# Altium PCB Soldeerstation_PCB.PcbDoc (part 1 of 2)
Units mil, origin at the board's own origin, x right, y up, seen from the top; angles counter-clockwise.
Board outline 2015.02 x 3477.09 mil, 2 copper layers (Top Layer, Bottom Layer); 67 components, 39 nets, 214 pads, 115 vias.
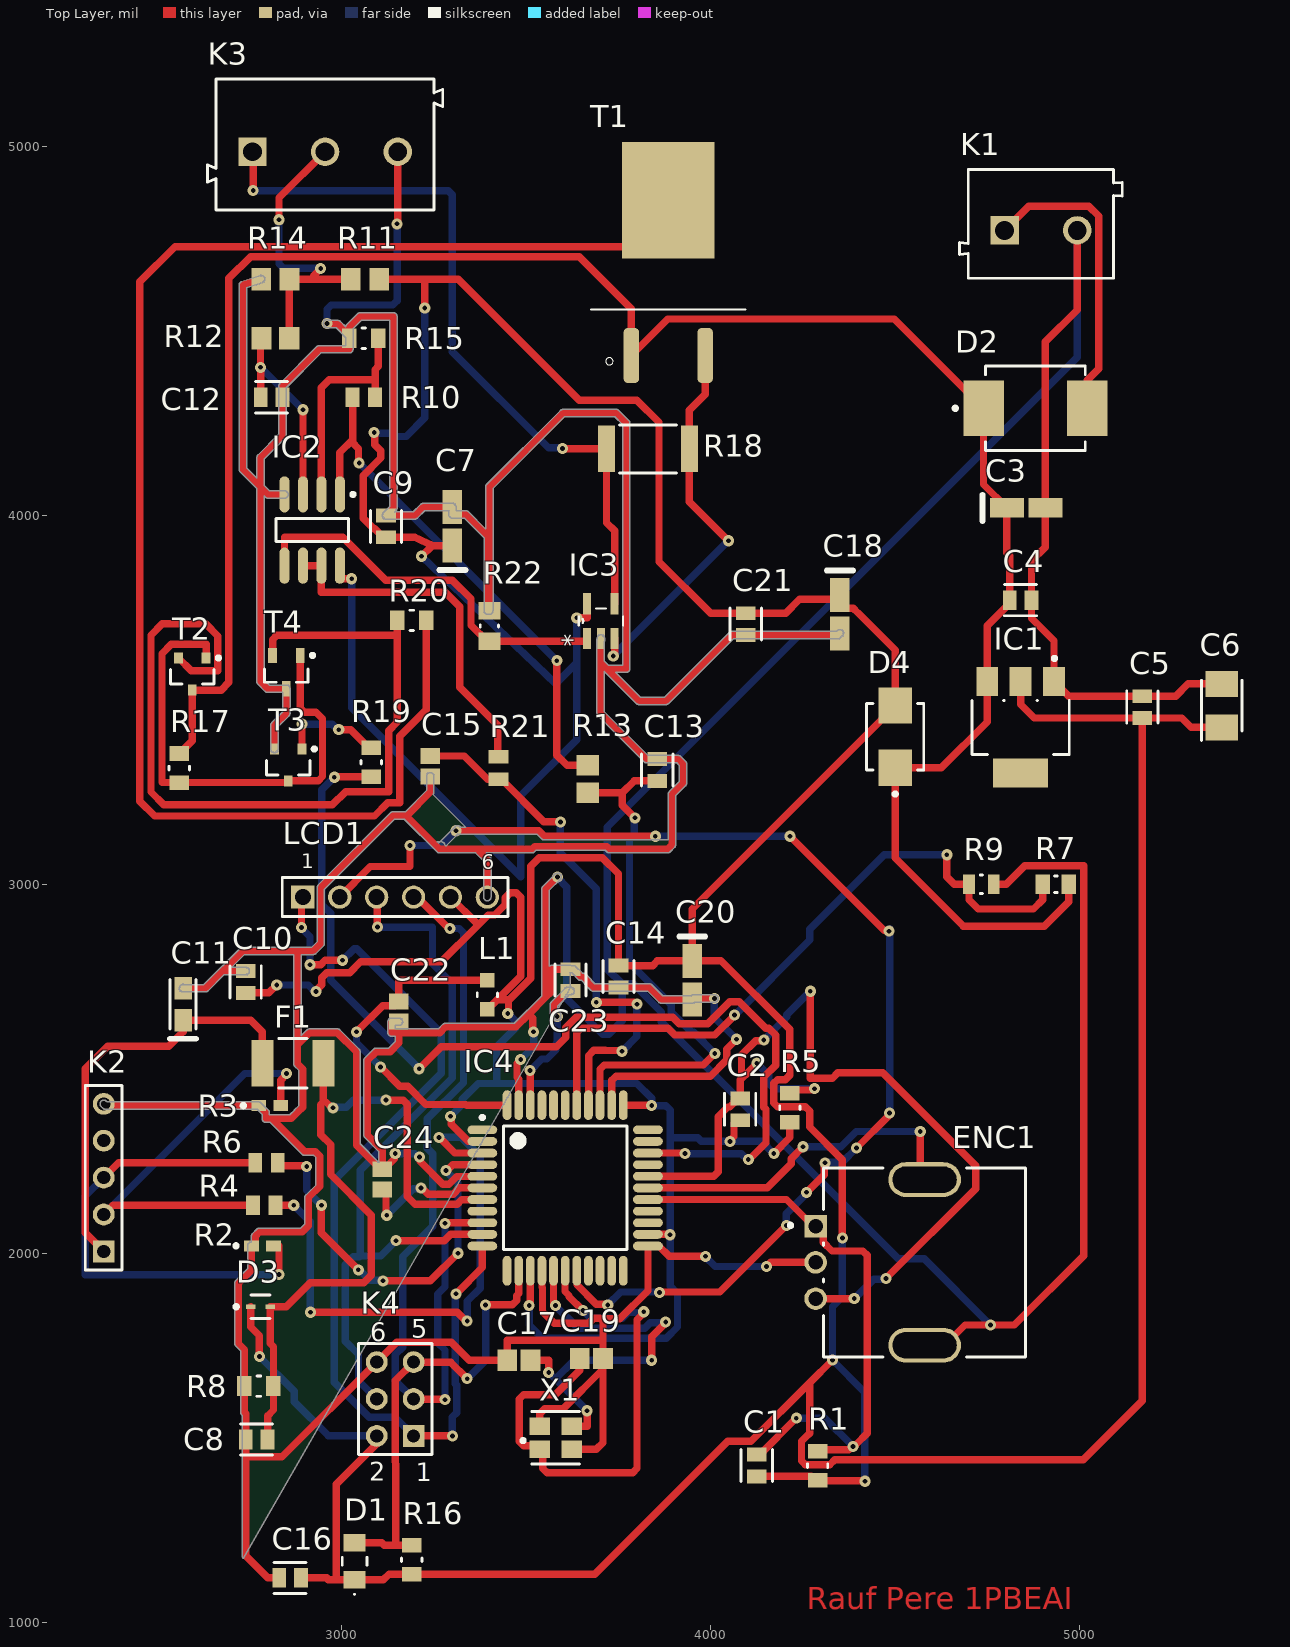
[diagram p0: Top Layer view]
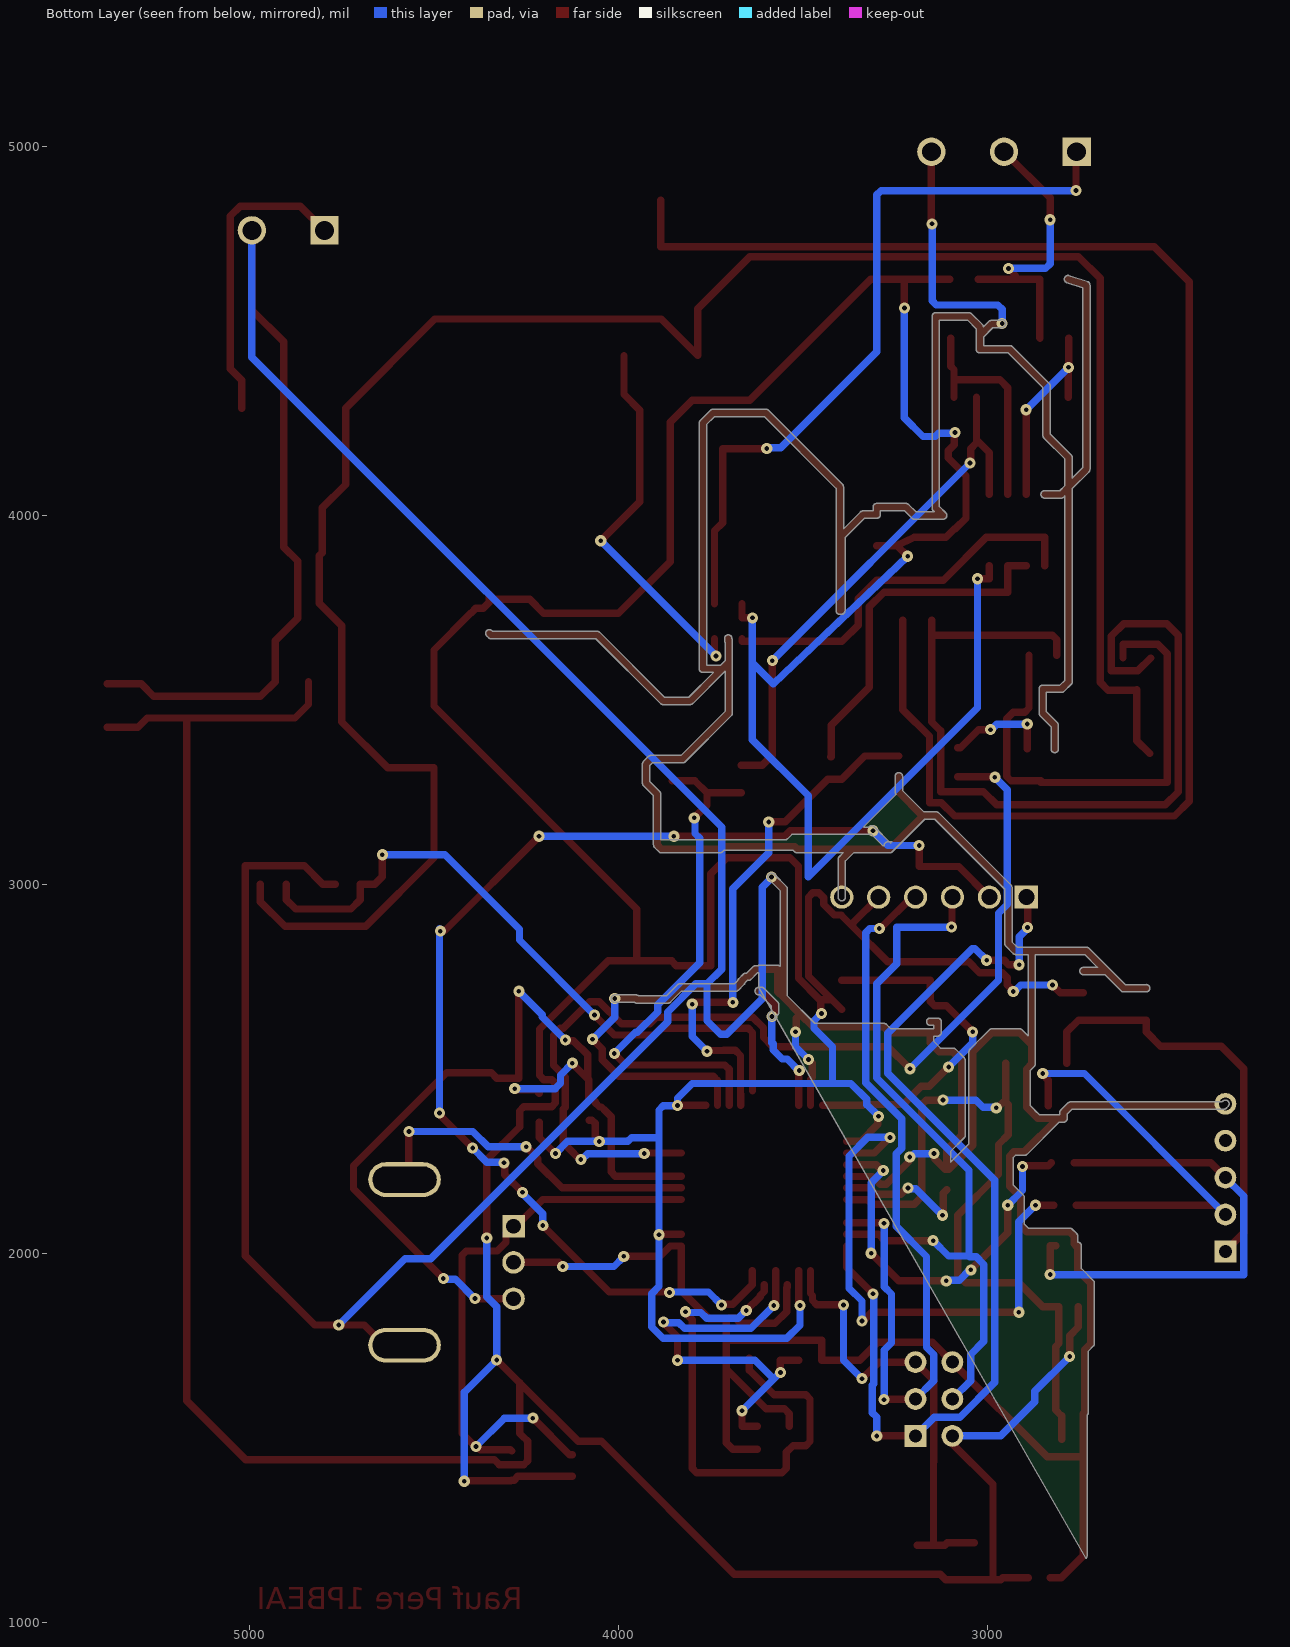
[diagram p1: Bottom Layer view, seen from below]

## Layer stack, top to bottom
Top Solder: solder mask 0.4, Solder Resist, Dk 3.5
Top Layer: signal copper 1.4
Dielectric 1: dielectric 12.6, FR-4, Dk 4.8
Bottom Layer: signal copper 1.4
Bottom Solder: solder mask 0.4, Solder Resist, Dk 3.5

## Board outline
372 vertices, not listed, extent 2344.99,1172.92 4360.02,4650.01

## Design rules (kind name [scope] priority, off if disabled: settings)
Clearance [All] p1: gap=7 ignorepadtopadclearanceinfootprint=FALSE
HoleSize [IsVia] p1: absolutevalues=TRUE maxlimit=13 minlimit=13 maxpercent=80.000 minpercent=20.000
HoleToHoleClearance HoleToHoleClearance_1 [All] p1: gap=19.68 allowstackedmicrovias=TRUE
PasteMaskExpansion [All] p1: expansion=10
PolygonConnect [All] p1: connectstyle=Relief reliefconductorwidth=10 reliefentries=4 polygonreliefangle="90 Angle" airgapwidth=10
RoutingVias [All] p1: holewidth=13 width=30 viastyle="Through Hole" minholewidth=13 minwidth=30 maxholewidth=13 maxwidth=30
SolderMaskExpansion [All] p1: expansion=10 istentingtop=FALSE
Width [All] p1: maxlimit=20 minlimit=20 preferedwidth=20 minimp=50.000000 maximp=50.000000 favimp=50.000000
27 further rules are at their usual default settings.

## Classes and differential pairs
component class Schema_Soldeerbout5: C1 C2 C10 ENC1 LCD1 R1 R5
component class Schema_Soldeerbout4: C12 C13 C15 C18 C21 IC3 K3 R7 R9 R10 R11 R12 R13 R14 R15 R17 R18 R19 R20 R21 R22 T1 T2 T3 T4
component class Schema_Soldeerbout3: K4
component class Schema_Soldeerbout2: C8 C11 D3 F1 K2 R2 R3 R4 R6 R8
component class Schema_Soldeerbout1: C3 C4 C5 C6 C7 C9 D2 D4 IC1 K1
component class ATMEGA: C14 C16 C17 C19 C20 C22 C23 C24 D1 IC4 L1 R16 X1

## Components (designator, comment, footprint, x,y, rotation, side; value= is the part's Value field where it differs from the comment)
C1 "C0805C103K2RACTU" FP-C0805C-DN-MFG 4124.68,1424.69 r90 top value="10,000 pF"
C2 "C0805C103K2RACTU" FP-C0805C-DN-MFG 4079.68,2390.16 r90 top value="10,000 pF"
C3 "T491A106K010AT" KEMT-A-3216-18-2_M 4855,4020 r0 top
C4 "C0805C104K5RACTU" FP-C0805C-DN-MFG 4840,3770 r0 top value="0.10 μF"
C5 "C0805C104K5RACTU" FP-C0805C-DN-MFG 5170,3480 r90 top value="0.10 μF"
C6 "10TPB47M" CAPPM3528X210N 5385,3484.06 r90 top
C7 "T491A106K010AT" KEMT-A-3216-18-2_M 3300,3970 r90 top
C8 "C0805C104K5RACTU" FP-C0805C-DN-MFG 2769.53,1495 r180 top value="0.10 μF"
C9 "C0805C104K5RACTU" FP-C0805C-DN-MFG 3120,3970 r90 top value="0.10 μF"
C10 "C0805C104K5RACTU" FP-C0805C-DN-MFG 2739.68,2735.16 r90 top value="0.10 μF"
C11 "TAJA226K010RNJ" AVX-TAJ-A-2_L 2570,2675 r90 top
C12 "C0805C103K2RACTU" FP-C0805C-DN-MFG 2810,4320 r0 top value="10,000 pF"
C13 "C0805C103K2RACTU" FP-C0805C-DN-MFG 3855,3309.53 r90 top value="10,000 pF"
C14 "C0805C104K5RACTU" FP-C0805C-DN-MFG 3750,2750 r270 top value="0.10 μF"
C15 "C0805C105K4PACTU" CAPC2013X145X50LL20T25 3240,3320 r90 top
C16 "C0805C104K5RACTU" FP-C0805C-DN-MFG 2860,1120 r180 top value="0.10 μF"
C17 "08052U220GAT2A" CAPC2013X115X51NL20T26 3480,1710 r0 top
C18 "T491A106K010AT" KEMT-A-3216-18-2_M 4350,3732.17 r270 top
C19 "08052U220GAT2A" CAPC2013X115X51NL20T26 3676.5,1715 r180 top
C20 "T491A106K010AT" KEMT-A-3216-18-2_M 3950,2740 r270 top
C21 "C0805C104K5RACTU" FP-C0805C-DN-MFG 4095,3705 r270 top value="0.10 μF"
C22 "C0805C105K4PACTU" CAPC2013X145X50LL20T25 3155,2655 r90 top
C23 "C0805C104K5RACTU" FP-C0805C-DN-MFG 3620,2740 r90 top value="0.10 μF"
C24 "C0805C105K4PACTU" CAPC2013X145X50LL20T25 3110,2200 r270 top
D1 "CD1206-S01575" BOUR-CD1206-S01575-2_L 3035,1165.2 r270 top
D2 "MBRS540T3G" ONSC-SMC-2-403-03_V 4880,4290 r0 top
D3 "BAT54KFILM" FP-SOD-523-MFG 2780,1855 r0 top value=7pF
D4 "S1AB-13-F" FP-SMB-MFG 4500,3400 r90 top
ENC1 "PEC11R-4015F-N0024" FP-PEC11R-4015F-N0024-MFG 4579.68,1975.16 r270 top
F1 "MF-MSMF050-2" FP-MF-MSMF050-2-MFG 2867.68,2515 r0 top value=0.15-1Ω
IC1 "NCP1117ST50T3G" FP-318H-MFG 4840,3425 r270 top
IC2 "MCP6002-E/SN" SOIC-SN8_M 2920,3960 r270 top
IC3 "INA138NA/250" DBV5 3702.4,3713 r90 top
IC4 "ATmega32U4-AU" 44ML_M 3605.59,2177.01 r0 top
K1 "691102710002" 691102710002 4895,4790 r0 top
K2 "Header 5" HDR1X5 2355,2005 r90 top
K3 "691101710003" 691101710003 2955,5005 r0 top
K4 "Header 3X2" HDR2X3 3195,1505 r90 top
L1 "MH2029-300Y" FP-MH2029-MFG 3395,2700 r90 top value=30Ω
LCD1 "61300611121" 61300611121 3144.68,2965.16 r0 top
R1 "RN73C2A10KBTDF" FP-RN732A-MFG 4289.68,1424.53 r270 top value=10KΩ
R2 "CG0603MLC-05E" BOUR-CG0603-2_V 2785.08,2020 r0 top
R3 "CG0603MLC-05E" BOUR-CG0603-2_V 2804.92,2400 r0 top
R4 "ERJ6ENF22R0V" RESC2013X70X40LL20T20 2790,2130 r0 top
R5 "RN73C2A10KBTDF" FP-RN732A-MFG 4214.68,2394.53 r270 top value=10KΩ
R6 "ERJ6ENF22R0V" RESC2013X70X40LL20T20 2796.02,2245 r0 top
R7 "RC0805FR-0710KL" RESC2013X60X35NL10T20 4935.43,3000 r0 top
R8 "RN73C2A10KBTDF" FP-RN732A-MFG 2775.63,1640 r0 top value=10KΩ
R9 "CRCW08052K70FKEA" FP-CRCW0805-e3-IPC_C 4733.5,3000 r0 top
R10 "RG2012P-183-D-T5" RESC2013X50X40LL20T20 3060,4320 r0 top
R11 "RR1220P-105-D" RESC2013X50X40ML20T20 3063.39,4640 r0 top
R12 "ERA6AEB562V" RESC2013X60X40ML20T25 2820,4480 r0 top
R13 "ERA6AEB562V" RESC2013X60X40ML20T25 3667.4,3285 r90 top
R14 "RR1220P-105-D" RESC2013X50X40ML20T20 2820,4640 r0 top
R15 "RN73C2A100RBTDF" FP-RN732A-MFG 3060,4480 r0 top value=100Ω
R16 "RN73C2A10KBTDF" FP-RN732A-MFG 3190,1169.37 r270 top value=10KΩ
R17 "RN73C2A4K75BTDF" FP-RN732A-MFG 2560,3315 r90 top value=4.75KΩ
R18 "CSRN2512FK20L0" FP-CSRN2512-IPC_C 3830,4180 r180 top
R19 "RN73C2A10KBTDF" FP-RN732A-MFG 3080,3330.63 r90 top value=10KΩ
R20 "RN73C2A100RBTDF" FP-RN732A-MFG 3190,3715 r0 top value=100Ω
R21 "RR1220P-104-D" RESC2013X50X40LL20T20 3425,3315 r90 top
R22 "CRCW0805560KFKEA" FP-CRCW0805-e3-IPC_A 3400,3700 r90 top
T1 "IRF9540NSPBF" DPAK508P1524X483-3N 3885,4685 r0 top
T2 "BC847C" INF-SOT23_L 2595,3570 r270 top
T3 "BC847C" INF-SOT23_L 2855,3323.31 r270 top
T4 "BC857C" INF-SOT23_N 2850,3575 r270 top
X1 "ABM8AIG-16.000MHZ-12-2Z-T3" FP-ABM8AIG-MFG 3580,1500 r0 top

## Footprints (in the part's own frame and the unit in brackets; to place one, negate y for a bottom-side part, rotate by r counter-clockwise, add the part's x,y. Pads: shape width x height; smd on the part's side, far side on the other; paste and mask are expansions set on the pad)
44ML_M [mm] "Thin QFP, 44-Leads, Body 10x10mm, Pitch 0.8mm, IPC Low Density"
  oval 2.05x0.6 smd: 1(-5.7,4) 2(-5.7,3.2) 3(-5.7,2.4) 4(-5.7,1.6) 5(-5.7,0.8) 6(-5.7,0) 7(-5.7,-0.8) 8(-5.7,-1.6) 9(-5.7,-2.4) 10(-5.7,-3.2) 11(-5.7,-4) 23(5.7,-4) 24(5.7,-3.2) 25(5.7,-2.4) 26(5.7,-1.6) 27(5.7,-0.8) 28(5.7,0) 29(5.7,0.8) 30(5.7,1.6) 31(5.7,2.4) 32(5.7,3.2) 33(5.7,4)
  oval 0.6x2.05 smd: 12(-4,-5.7) 13(-3.2,-5.7) 14(-2.4,-5.7) 15(-1.6,-5.7) 16(-0.8,-5.7) 17(0,-5.7) 18(0.8,-5.7) 19(1.6,-5.7) 20(2.4,-5.7) 21(3.2,-5.7) 22(4,-5.7) 34(4,5.7) 35(3.2,5.7) 36(2.4,5.7) 37(1.6,5.7) 38(0.8,5.7) 39(0,5.7) 40(-0.8,5.7) 41(-1.6,5.7) 42(-2.4,5.7) 43(-3.2,5.7) 44(-4,5.7)
  silkscreen extent -5.82,-4.25 4.25,4.97, body extent -5,-5 5,5, height 1.2
61300611121 [mm] "Pin Header, pitch 2.54 mm, THT, Vertical, single row, 6p"
  rect 1.6x1.6 hole 1.1: 1(-6.35,0)
  round 1.6 hole 1.1: 2(-3.81,0) 3(-1.27,0) 4(1.27,0) 5(3.81,0) 6(6.35,0)
  silkscreen extent -7.77,-1.34 7.77,1.34, body extent -7.62,-1.27 7.62,1.27, height 8.57
691101710003 [mm] "5,00mm - modular - blue - Horizontal entry with pressure clamp - 12,6mm height - 03p"
  rect 1.95x1.95 hole 1.3: 1(-5,-0.5)
  round 1.95 hole 1.3: 2(0,-0.5) 3(5,-0.5)
  silkscreen extent -8.1,-4.5 8.1,4.5, body extent -8.1,-4.5 8.1,4.5, height 12.65
691102710002 [mm] "5,00mm - modular - blue - Horizontal entry with pressure clamp - 9,9 mm height - 02p"
  rect 1.95x1.95 hole 1.3: 1(-2.5,-0.45)
  round 1.95 hole 1.3: 2(2.5,-0.45)
  silkscreen extent -5.6,-3.75 5.6,3.75, body extent -5.6,-3.75 5.6,3.75, height 9.96
AVX-TAJ-A-2_L [mm] "Molded Capacitor, 2-Leads, Body 3.4x1.8mm, IPC High Density"
  rect 1.55x1.2 smd: 1(-1.1,0) 2(1.1,0)
  silkscreen extent -2.38,-0.9 1.7,0.9, body extent -1.92,-0.9 1.92,0.9, height 1.8
BOUR-CD1206-S01575-2_L [mm] "Molded Diode, 2-Leads, Body 3.4x1.7mm, IPC High Density"
  rect 1.2x1.5 smd: 1(-1.275,0) 2(1.275,0)
  silkscreen extent -0.27,-0.85 2.32,0.85, body extent -1.7,-0.85 1.7,0.85, height 0.95
BOUR-CG0603-2_V [mm] "SMD, 2-Leads, Body 1.6x0.8mm, Pitch 1.52mm"
  rect 1.02x0.76 smd: 1(-0.76,0) 2(0.76,0)
  silkscreen extent -1.94,-0.12 -1.69,0.12, body extent -0.8,-0.4 0.8,0.4, height 0.55
CAPC2013X115X51NL20T26 [mm] "Chip Capacitor, 2-Leads, Body 2.01x1.25mm, IPC Medium Density"
  rect 1.35x1.45 smd: 1(-0.8,0) 2(0.8,0)
  body extent -1.11,-0.72 1.1,0.72, height 1.15
CAPC2013X145X50LL20T25 [mm] "Chip Capacitor, 2-Leads, Body 2.00x1.25mm, IPC High Density"
  rect 1.1x1.35 smd: 1(-0.7,0) 2(0.7,0)
  body extent -1.1,-0.72 1.1,0.72, height 1.45
CAPPM3528X210N [mm]
  rect 1.8x2.25 smd: 1(-1.5,0) 2(1.5,0)
  silkscreen extent -2.4,-1.4 1.75,1.4, body extent 0,0 0,0
DBV5 [mil]
  rect 58x22 smd: 1(-47,37.4) 2(-47,0) 3(-47,-37.4) 4(47,-37.4) 5(47,37.4)
  silkscreen extent -12,-60 34,60, body extent 0,-42 355,72, height 47
DPAK508P1524X483-3N [mm]
  rrect53% 1.06x3.78 smd: 1(-2.54,-6.4) 3(2.54,-6.4)
  rect 6.39x8 smd paste-5 mask+0: 2(0,4.29)
  silkscreen extent -5.34,-7.05 5.32,-3.24, body extent -5.08,-7.62 5.08,7.62, height 4.83
FP-318H-MFG [mm]
  rect 2x1.5 smd paste+0 mask+0: 1(-3.15,2.3) 2(-3.15,0) 3(-3.15,-2.3)
  rect 2x3.8 smd paste+0 mask+0: 4(3.15,0)
  silkscreen extent -4.87,-3.35 1.85,3.35, body extent -4.25,-3.68 4.25,3.68, height 0.25
FP-ABM8AIG-MFG [mm]
  rect 1.4x1.2 smd paste+0 mask+0: 1(-1.1,-0.8) 2(1.1,-0.8) 3(1.1,0.8) 4(-1.1,0.8)
  silkscreen extent -2.37,-1.8 1.65,1.8, body extent -1.9,-1.5 1.9,1.5, height 0.25
FP-C0805C-DN-MFG [mm]
  rect 0.95x1.35 smd paste+0 mask+0: 1(-0.75,0) 2(0.75,0)
  silkscreen extent -1.1,-1.07 1.1,1.07, body extent -1.4,-0.85 1.4,0.85, height 0.25
FP-CRCW0805-e3-IPC_A [mil]
  rect 47.5x59.38 smd paste+0 mask+0: 1(-41.37,0) 2(41.37,0)
  silkscreen extent -3,-25 3,25, body extent -85,-49 85,49, height 10
FP-CRCW0805-e3-IPC_C [mil]
  rect 31.75x51.5 smd paste+0 mask+0: 1(-33.5,0) 2(33.5,0)
  silkscreen extent -3,-25 3,25, body extent -53,-31 53,31, height 10
FP-CSRN2512-IPC_C [mil]
  rect 45.46x126.31 smd paste+0 mask+0: 1(-112.24,0) 2(112.24,0)
  silkscreen extent -78,-65 78,65, body extent -139,-69 139,69, height 10
FP-MF-MSMF050-2-MFG [mm]
  rect 1.5x3.2 smd paste+0 mask+0: 1(-2.1,0) 2(2.1,0)
  silkscreen extent -0.98,-1.71 0.98,1.71, body extent -2.95,-1.81 2.95,1.81, height 0.25
FP-MH2029-MFG [mm]
  rect 1x1 smd paste+0 mask+0: 1(-1,0) 2(1,0)
  silkscreen extent -0.13,-0.7 0.13,0.7, body extent -1.6,-0.8 1.6,0.8, height 0.25
FP-PEC11R-4015F-N0024-MFG [mm]
  rrect100% 2.4x5 hole 4.4 slot 1.8 at 0 deg paste-1000 mask+0: 1(-5.7,0) 2(5.7,0)
  rect 1.55x1.55 hole 1 paste-1000 mask+0: A(-2.5,-7.5)
  round 1.55 hole 1 paste-1000 mask+0: B(2.5,-7.5) C(0,-7.5)
  silkscreen extent -6.5,-9.35 6.5,6.95, body extent -7,-8.37 7,7.05, height 0.25
FP-RN732A-MFG [mm]
  rect 1x1.35 smd paste+0 mask+0: 1(-1,0) 2(1,0)
  silkscreen extent -0.13,-0.7 0.13,0.7, body extent -1.6,-0.8 1.6,0.8, height 0.25
FP-SMB-MFG [mm]
  rect 2.5x2.3 smd paste+0 mask+0: 1(-2.15,0) 2(2.15,0)
  silkscreen extent -4.07,-1.97 2.28,1.97, body extent -3.5,-2.07 3.5,2.07, height 0.25
FP-SOD-523-MFG [mm]
  rect 0.65x0.3 smd paste+0 mask+0: 1(-0.675,0) 2(0.675,0)
  silkscreen extent -1.8,-0.8 0.65,0.8, body extent -1.1,-0.55 1.1,0.55, height 0.25
HDR1X5 [mm] "Connector; Header; 5 Position"
  rect 1.5x1.5 hole 0.9: 1(0,0)
  round 1.5 hole 0.9: 2(2.54,0) 3(5.08,0) 4(7.62,0) 5(10.16,0)
  silkscreen extent -1.27,-1.27 11.43,1.27
HDR2X3 [mm] "Connector; Header; 3x2 Position"
  rect 1.5x1.5 hole 0.9: 1(0,0)
  round 1.5 hole 0.9: 2(0,2.54) 3(2.54,0) 4(2.54,2.54) 5(5.08,0) 6(5.08,2.54)
  silkscreen extent -1.27,-1.27 6.35,3.81
INF-SOT23_L [mm] "SOT23, 3-Leads, Body 2.9x1.3 mm, Pitch 0.95 mm, IPC High Density"
  rect 0.75x0.6 smd: 1(-1.1,0.95) 2(-1.1,-0.95) 3(1.1,0)
  silkscreen extent -1.22,-1.5 0.7,1.93, body extent -0.7,-1.5 0.7,1.5, height 1.1
INF-SOT23_N [mm] "SOT23, 3-Leads, Body 2.9x1.3 mm, Pitch 0.95 mm, IPC Medium Density"
  rect 1.05x0.6 smd: 1(-1.15,0.95) 2(-1.15,-0.95) 3(1.15,0)
  silkscreen extent -1.27,-1.5 0.7,1.93, body extent -0.7,-1.5 0.7,1.5, height 1.1
KEMT-A-3216-18-2_M [mm] "Molded TAN Capacitor, 2-Leads, Body 3.4x1.8mm, IPC Low Density"
  rect 2.35x1.35 smd: 1(-1.325,0) 2(1.325,0)
  silkscreen extent -3,-0.9 -3,0.9, body extent -1.7,-0.9 1.7,0.9, height 1.8
ONSC-SMC-2-403-03_V [mil] "Molded, 2-Leads, Body 6.86x5.84mm"
  rect 110x150 smd: 1(-140.49,0) 2(140.49,0)
  silkscreen extent -222,-115 135,115, body extent -135,-115 135,115, height 99
RESC2013X50X40LL20T20 [mm] "Chip Resistor, 2-Leads, Body 2.00x1.25mm, IPC High Density"
  rect 0.95x1.35 smd: 1(-0.775,0) 2(0.775,0)
  body extent -1.1,-0.72 1.1,0.72, height 0.5
RESC2013X50X40ML20T20 [mm] "Chip Resistor, 2-Leads, Body 2.00x1.25mm, IPC Low Density"
  rect 1.35x1.55 smd: 1(-0.975,0) 2(0.975,0)
  body extent -1.1,-0.72 1.1,0.72, height 0.5
RESC2013X60X35NL10T20 [mm] "Chip Resistor, 2-Leads, Body 2.1x1.35mm, IPC Medium Density"
  rect 1x1.35 smd: 1(-0.9,0) 2(0.9,0)
  silkscreen extent -0.1,-0.58 0.1,0.58, body extent -1.05,-0.68 1.05,0.67, height 0.6
RESC2013X60X40ML20T25 [mm] "Chip Resistor, 2-Leads, Body 2.00x1.25mm, IPC Low Density"
  rect 1.4x1.55 smd: 1(-0.95,0) 2(0.95,0)
  body extent -1.1,-0.72 1.1,0.72, height 0.6
RESC2013X70X40LL20T20 [mm] "Chip Resistor, 2-Leads, Body 2.00x1.25mm, IPC High Density"
  rect 0.95x1.35 smd: 1(-0.775,0) 2(0.775,0)
  body extent -1.1,-0.72 1.1,0.72, height 0.7
SOIC-SN8_M [mm] "SOIC, 8-Leads, Body 4.9x3.9mm, Pitch 1.27mm, IPC Low Density"
  oval 2.5x0.7 smd: 1(-2.45,1.905) 2(-2.45,0.635) 3(-2.45,-0.635) 4(-2.45,-1.905) 5(2.45,-1.905) 6(2.45,-0.635) 7(2.45,0.635) 8(2.45,1.905)
  silkscreen extent -2.57,-2.5 0.8,2.93, body extent -2,-2.5 2,2.5, height 1.75

## Part data
C1 C2 C12 C13: library part CMP-2007-00259-2, "CAP CER 10000PF 200V X7R 0805", Capacitance="10,000 pF", Manufacturer=KEMET, Package=C0805C-DN, Temperature="-55°C to +125°C", Temperature Characteristic=X7R, Temperature Coefficient=30ppm/°C, Temperature Range High=+125°C, Temperature Range Low=-55°C, Tolerance=0.1, Voltage Rating="200 V", Automotive=No, Category=Cap, ComponentLink2Description=Datasheet, ComponentLink2URL=https://content.kemet.com/datasheets/KEM_C1003_C0G_SMD.pdf, Device Class L1="Passive Components", Device Class L2=Capacitors, Device Class L3="Ceramic Capacitors", Digikey Description="CAP CER 10000PF 200V X7R 0805", Height=0.88mm, Ipc Land Pattern Name=CAPC200125X78, Lead Free=Yes, Manufacturer Part Number=C0805C103K2RACTU, Material=Ceramic, Mouser Description="KEMET - C0805C103K2RACTU - CAP, MLCC, X7R, 10NF, 200V, 0805", Octopart=https://octopart.com/c0805c103k2ractu-kemet-9138347, RoHS=TRUE
C3 C7 C18 C20: library part CMP-2000-05172-1, "Capacitor, Tantalum, 10 uF, +/- 10%, 10 V, -55 to 125 degC, 2-Pin SMD (1206), RoHS, Tape and Reel", Capacitance=10µF, ESR (Equivalent Series Resistance)=3.8Ohm, Lifetime @ Temp.=2000Hrs@85degC, Manufacturer=Kemet, Manufacturer Size Code=A, Operating Temperature=-55degC~125degC, Package / Case=1206(3216Metric), Package Description="2-Pin Surface Mount Device, Body 3.2 x 1.6 mm", Package Reference=1206, Standard Package=2,000, Tolerance=±10%, Voltage - Rated=10V, Catalog Drawings=T49x,T5xxSeries_A-side1T49x,T5xxSeries_A,B-side2T49x,T5xxSeries_A,SBottom, Category=Capacitors, Datasheet URL=http://www.farnell.com/datasheets/1824869.pdf, Datasheet Version=Apr-14, Family=TantalumCapacitors, Features=GeneralPurpose, Height - Seated (Max)="0.071\"(1.80mm)", Lead Spacing=-, Manufacturer URL=http://www.kemet.com/, Mounting Type=SurfaceMount, Online Catalog=T491Series, Other Names=399-3684-2, Packaging=Tape&Reel(TR), Product Training Modules=CapacitorBasics-TypicalUsesforCapacitorsDeratingGuidelinesforSurfaceMountTantalumCapacitors, Series=T491, Size / Dimension="0.126\"Lx0.063\"W(3.20mmx1.60mm)", Type=Molded
C4 C5 C8 C9 C10 C14 C16 C21 C23: library part CMP-2007-00279-2, "CAP CER 0.1UF 50V X7R 0805", Capacitance="0.10 μF", Manufacturer=KEMET, Package=C0805C-DN, Temperature="-55°C to +125°C", Temperature Characteristic=X7R, Temperature Coefficient=30ppm/°C, Temperature Range High=+125°C, Temperature Range Low=-55°C, Tolerance=0.1, Voltage Rating="50 V", Automotive=No, Category=Cap, ComponentLink2Description=Datasheet, ComponentLink2URL=https://content.kemet.com/datasheets/KEM_C1003_C0G_SMD.pdf, Device Class L1="Passive Components", Device Class L2=Capacitors, Device Class L3="Ceramic Capacitors", Digikey Description="CAP CER 0.1UF 50V X7R 0805", Height=0.88mm, Ipc Land Pattern Name=CAPC200125X78, Lead Free=Yes, Manufacturer Part Number=C0805C104K5RACTU, Material=Ceramic, Mouser Description="Cap Ceramic 0.1uF 50V X7R 10% SMD 2.0 x 1.2 mm 125 C Paper T/R", Octopart=https://octopart.com/c0805c104k5ractu-kemet-143926, RoHS=TRUE
C6: "Capacitor Polarised", Manufacturer_Name=Panasonic, Mouser Part Number=667-10TPB47M, Arrow Part Number=10TPB47M, Arrow Price/Stock=https://www.arrow.com/en/products/10tpb47m/panasonic, Datasheet Link=https://www.mouser.com/datasheet/2/315/AAA8000C65-1150039.pdf, Height=2.1mm, Manufacturer_Part_Number=10TPB47M, Mouser Price/Stock=https://www.mouser.co.uk/ProductDetail/Panasonic/10TPB47M/?qs=OE1iw1LrrPF6e38T0%252BNoyw%3D%3D
C11: library part CMP-2000-07524-1, "Chip Capacitor, 22 uF, +/- 10%, 10 V, -55 to 125 degC, 1206 (3216 Metric), RoHS, Tape and Reel", Capacitance=22uF, Case Code (Imperial)=1206, Case Code (Metric)=3216, Dielectric Material=Tantalum, ESR (Equivalent Series Resistance)=3Ohm, Leakage Current=2.2uA, Manufacturer=AVX, Max Operating Temperature=125degC, Min Operating Temperature=-55degC, Package Description="2-Pin Surface Mount Device, Body 3.2 x 1.65 mm", Package Quantity=1, Package Reference=TAJ-A-2, Tolerance=10%, Voltage=10V, Case/Package=1206, Datasheet URL=http://datasheets.avx.com/TAJ.pdf, Datasheet Version=09/2017, Depth=1.6mm, Dissipation Factor=8%, Height=1.6mm, Height - Seated (Max)=0.071inch, Lead Free=LeadFree, Lead Pitch=1.1mm, Length=3.2mm, Manufacturer URL=http://www.avx.com/, Mount=PCB, Mounting Technology=SurfaceMount, Number of Pins=2, Packaging=TapeandReel, Polarity=Polar, Radiation Hardening=No, REACH SVHC=NoSVHC, RoHSCompliant=True, Termination=SMD/SMT, Voltage Rating=10V, Voltage Rating (DC)=10V, Width=1.6mm
C15 C22 C24: library part CMP-1036-04746-2, Manufacturer=Kemet, Part Number=C0805C105K4PACTU
C17 C19: library part CMP-2007-04866-1, Manufacturer="AVX Interconnect / Elco", Part Number=08052U220GAT2A
D1: library part CMP-0583-00001-2, "75 V Small Signal Switching Diode, 150 mA, 2.5 uA, 1026 Molded Package, RoHS, Tape and Reel", Average Forward Current="150 mA", Capacitance Between Terminals (Max.)="3 pF", Forward Voltage (Max.)="1.00 V", Manufacturer=Bourns, Reverse Current (Max.)="2.5 uA", Reverse Voltage="75 V", ComponentLink1Description="Manufacturer URL", ComponentLink1URL=http://www.bourns.com/, ComponentLink2Description=Datasheet, ComponentLink2URL=http://www.bourns.com/data/global/pdfs/CD1206_S01575.pdf, ComponentLink3Description="Package Specification", ComponentLink3URL=http://www.bourns.com/data/global/pdfs/CD1206_S01575.pdf, DatasheetVersion="Rev. 06/11", Mounting Technology="Surface Mount", PackageDescription="2-Pin SMD, Body 3.2 x 1.5 mm", PackageReference=CD1206-S01575-2, Packing="Tape and Reel", PartNumber=CD1206-S01575, Reverse Recovery Time (Max.)="4 nS", RoHS=TRUE
D2: library part CMP-1055-00390-1, "Schottky Power Rectifier, 2-Pin SMC, Pb-Free, Tape and Reel", Manufacturer="On Semiconductor", ComponentLink1Description="Manufacturer URL", ComponentLink1URL=http://www.onsemi.com/, ComponentLink2Description=Datasheet, ComponentLink2URL=http://www.onsemi.cn/pub_link/Collateral/MBRS540T3-D.PDF, ComponentLink3Description="Package Specification", ComponentLink3URL=http://www.onsemi.com/pub_link/Collateral/403-03.PDF, Configuration=Single, DatasheetVersion="Rev. 8", IFSM Max (A)=190, Mounting Technology="Surface Mount", PackageDescription="2-Pin Small Molded Package, J-Bend Lead, Body 5.845 x 6.855 mm", PackageReference=SMC-2-403-03, PackageVersion="Rev. E, 08/2005", Packing="Tape and Reel", PartNumber=MBRS540T3G, RoHS=TRUE
D3: library part CMP-12187-000026-1, "DIODE SCHOTTKY 40V 300MA SOD523", Capacitance=7pF, Forward Current=300mA, Manufacturer=STMicroelectronics, Max Junction Temp=+150°C, Max Repetitive Reverse Voltage=40V, Max Surge Forward Current=1.25A, Package=SOD-523, Peak Reverse Current=1uA, Temperature="-40°C to +150°C", Temperature Range Low=-40°C, Automotive=No, Category=Diode, ComponentLink2Description=Datasheet, ComponentLink2URL=https://www.st.com/content/ccc/resource/technical/document/datasheet/07/50/54/f2/0d/ba/4a/79/CD00001322.pdf/files/CD00001322.pdf/jcr:content/translations/en.CD00001322.pdf, Device Class L1="Discrete Semiconductors", Device Class L2=Diodes, Device Class L3="Schottky Diodes", Digikey Description="DIODE SCHOTTKY 40V 300MA SOD523", Height=0.7mm, Lead Free=Yes, Manufacturer Part Number=BAT54KFILM, Mouser Description="Schottky Diodes & Rectifiers schottky diode", Octopart=https://octopart.com/bat54kfilm-stmicroelectronics-39618022, RoHS=TRUE, Temperature Range High=+150°C
D4: library part CMP-0586-00001-3, "DIODE GEN PURP 50V 1A SMB", Average Rectified Current=1A, Capacitance=10pF, Case/Package=SMB, Forward Voltage=1.1V, Max Operating Temperature=150°C, Max Repetitive Reverse Voltage (Vrrm)=50V, Max Surge Current=30A, Min Operating Temperature=-65°C, Package Quantity=3000, Peak Reverse Current=5uA, Current Rating=1A, Element Configuration=Single, Forward Current=1A, Height=2.42mm, Lead Free="Lead Free", Length=4.57mm, Max Reverse Voltage (DC)=50V, Number of Pins=2, Output Current=1A, Packaging="Tape and Reel", Peak Non-Repetitive Surge Current=30A, Polarity=Standard, Radiation Hardening=No, Recovery Time=1.8us, Reverse Recovery Time=1.8us, Reverse Voltage (DC)=50V, Termination=SMD/SMT, Voltage Rating (DC)=50V, Weight=0.00328oz, Width=3.94mm
ENC1: library part CMP-07421-000003-1, "ROTARY ENCODER MECHANICAL 24PPR", Current Rating=10mA, Manufacturer=Bourns, Package=0, Temperature="-30°C to +70°C", Temperature Range High=+70°C, Temperature Range Low=-30°C, Voltage Rating Dc=5V, Automotive=No, Category=Enc, ComponentLink2Description=Datasheet, ComponentLink2URL=https://www.bourns.com/docs/product-datasheets/pec11r.pdf?sfvrsn=bb617cbf_7, Conn Orientation=Vertical, Detent=No, Device Class L1=Electromechanical, Device Class L2=Switches, Device Class L3=Encoders, Digikey Description="ROTARY ENCODER MECHANICAL 24PPR", Encoder Type=Incremental, Height=22.3mm, Lead Free=Yes, Manufacturer Part Number=PEC11R-4015F-N0024, Mouser Description="Encoders 15mm SHAFT NO SWITCH", Number Of Circuits=1, Octopart=https://octopart.com/pec11r-4015f-n0024-bourns-26648251, Pulses Per Rev=24, RoHS=TRUE
F1: library part CMP-2100-03653-2, "PTC RESET FUSE 15V 500MA 1812", Ambient Temperature Range High=+85°C, Ambient Temperature Range Low=-40°C, Current Rating=100A, Hold Current=0.5A, Manufacturer=Bourns, Package=1812, Resistance=0.15-1Ω, Temperature="-40°C to +85°C", Trip Current=1A, Voltage Rating=15V, Automotive=Yes, Automotive Grade="Grade 3", Category=Fuse, ComponentLink2Description=Datasheet, ComponentLink2URL=http://www.bourns.com/docs/Product-Datasheets/mfmsmf.pdf, Device Class L1="Circuit Protection", Device Class L2="PTC Resettable Fuses", Device Class L3=unset, Digikey Description="PTC RESET FUSE 15V 500MA 1812", Height=0.85mm, Lead Free=Yes, Manufacturer Part Number=MF-MSMF050-2, Mouser Description="PTC Resettable Fuse 0.5A(hold) 1A(trip) 15V 100A 0.8W 0.15s 0.15Ohm SMD Solder Pad 1812 T/R", Octopart=https://octopart.com/mf-msmf050-2-bourns-28047, RoHS=TRUE, Temperature Range High=+85°C, Temperature Range Low=-40°C, Trip Time=0.15s
IC1: library part CMP-0592-00001-3, "IC REG LINEAR 5V 1A SOT223", Case/Package=SOT-223, Dropout Voltage=1.2V, Input Bias Current=6mA, Max Input Voltage=20V, Max Operating Temperature=125°C, Max Output Current=1A, Min Input Voltage=3.5V, Min Operating Temperature=0°C, Nominal Output Voltage=5V, Output Voltage Accuracy=1%, Package Quantity=1, Power Rating=781mW, Quiescent Current=10mA, Accuracy=1%, Contact Plating=Tin, Halogen Free="Halogen Free", Height=1.69mm, Lead Free="Lead Free", Length=6.7mm, Min Current Limit=1A, Number of Outputs=1, Number of Pins=4, Number of Regulators=1, Output Current=1A, Output Type=Fixed, Output Voltage=5V, Packaging="Tape and Reel", Polarity=Positive, Radiation Hardening=No, REACH SVHC="No SVHC", Tolerance=1%, Width=3.7mm
IC2: library part CMP-0187-00368-2, "1 MHz, Low-Power Operational Amplifier, 8-Pin SOIC, Extended Temperature", Code_IPC=SOIC127P600-8, Code_JEDEC=MS-012, ComponentLink1Description="Manufacturer URL", ComponentLink1URL=http://www.microchip.com/, ComponentLink2Description=Datasheet, ComponentLink2URL=http://ww1.microchip.com/downloads/en/DeviceDoc/21733j.pdf, ComponentLink3Description="Package Specification", ComponentLink3URL=http://www.microchip.com/stellent/groups/techpub_sg/documents/packagingspec/en012702.pdf, DatasheetVersion="revJ, Nov-2009", PackageDescription="8-Lead Plastic Small Outline (SN) - Narrow, 3.90mm Body [SOIC]", PackageReference=SOIC-SN8, PackageVersion="revBB, Aug-2009", RevisionNote="URLs added."
IC3: "High-Side Measurement Current Shunt Monitor, Current Output", Manufacturer="Texas Instruments", PACKAGE_DESIGNATOR=DBV, Copyright="Copyright (C) 2018 Accelerated Designs. All rights reserved", Datasheet_URL=http://www.ti.com/lit/gpn/INA138, FAMILY_NAME="CURRENT SHUNT MONITOR", GENERIC_PART_NUMBER=INA138, INDUSTRY_STD_PKG_TYPE=SOT-23, Manufacturer_Part_Number=INA138NA/250, PIN_COUNT=5, RefDes=RefDes, Type=DEV, Vendor="Texas Instruments"
IC4: library part CMP-0095-00285-2, "8-bit AVR Microcontroller, 2.7-5.5V, 16MHz, 32KB Flash, 1KB EEPROM, 2.5KB SRAM, USB Controller, 44-pin TQFP, Industrial Grade (-40°C to 85°C), Ext Osc", ComponentLink1Description="Manufacturer URL", ComponentLink1URL=http://www.atmel.com/, ComponentLink2Description="ATmega16U4/32U4 Datasheet", ComponentLink2URL=http://www.atmel.com/dyn/resources/prod_documents/doc7766.pdf, ComponentLink3Description="ATmega16U4 ATmega32U4 Summary", ComponentLink3URL=http://www.atmel.com/dyn/resources/prod_documents/7766S.pdf, DatasheetVersion="revF, Nov-2010", PackageDescription="44-Pin Plastic Thin Quad Flat Pack, 10 x 10 x 1.0 mm Body, 0.8 mm Pitch (TQFP)", PackageReference=44ML, PackageVersion="rev.G, Jul-2007", RevisionNote="DatasheetVersion updated. URLs added."
K1: library part CMP-1502-03258-1, "Series 102 - 5.00 mm Horizontal Entry Modular with Pressure Clamp WR-TBL, 2 pin", Manufacturer="Wurth Elektronik", Operating Temperature=-40to105degC, Datasheet URL=http://katalog.we-online.de/em/datasheet/6911027100xx.pdf, Manufacturer URL=http://www.we-online.de, Mounting Technology=THT, Package Reference=691102710002, Packaging=Box, Part Number=691102710002, Pin Number=2, Pitch=5.00mm, Publisher=WurthElektronik
K2: "Header, 5-Pin", LatestRevisionDate=17-Jul-2002, LatestRevisionNote="Re-released for DXP Platform.", Publisher="Altium Limited"
K3: library part CMP-1502-03257-1, "Series 101 - 5.00 mm Horizontal Entry Modular with Pressure Clamp WR-TBL, 3 pin", Manufacturer="Wurth Elektronik", Operating Temperature=-40to105degC, Datasheet URL=http://katalog.we-online.de/em/datasheet/6911017100xx.pdf, Manufacturer URL=http://www.we-online.de, Mounting Technology=THT, Package Reference=691101710003, Packaging=Box, Part Number=691101710003, Pin Number=3, Pitch=5.00mm, Publisher=WurthElektronik
K4: "Header, 3-Pin, Dual row", LatestRevisionDate=17-Jul-2002, LatestRevisionNote="Re-released for DXP Platform.", Publisher="Altium Limited"
L1: library part CMP-07252-000001-1, "FERRITE BEAD 30 OHM 0805 1LN", Impedance At Frequency="30Ω @ 100MHz", Manufacturer=Bourns, Package=MH2029, Resistance=30Ω, Rms Current=3A, Series Resistance=25mΩ, Temperature="-55°C to +125°C", Temperature Range High=+125°C, Temperature Range Low=-55°C, Tolerance=25%, Automotive=No, Category=FBead, ComponentLink2Description=Datasheet, ComponentLink2URL=https://www.bourns.com/docs/Product-Datasheets/mh.pdf, Core Material=Ferrite, Device Class L1="Passive Components", Device Class L2="EMI / RFI Components", Device Class L3="Ferrite Beads and Chips", Digikey Description="FERRITE BEAD 30 OHM 0805 1LN", Height=1.1mm, Ipc Land Pattern Name=CAPC200120X90, Lead Free=Yes, Manufacturer Part Number=MH2029-300Y, Mouser Description="Ferrite Beads 30 ohms 25% HIGH CURRENT", Octopart=https://octopart.com/mh2029-300y-bourns-756929, RoHS=TRUE
LCD1: library part CMP-1502-01070-1, "THT Vertical Pin Header WR-PHD, Pitch 2.54 mm, Single Row, 6 pins", Contact Resistance=20mOhm, Manufacturer="Wurth Elektronik", Operating Temperature=-40to105degC, Rated Current=3A, Withstanding Voltage=500VAC, Working Voltage=250VAC, Datasheet URL=https://katalog.we-online.de/em/datasheet/6130xx11121.pdf, Gender=Male, Manufacturer URL=http://www.we-online.de, Mounting Technology=THT, Orientation=Vertical, Package Reference=61300611121, Packaging=Bag, Part Number=61300611121, Pin Number=6, Pitch=2.54mm, Publisher=WurthElektronik, Row Number=Single
R1 R5 R8 R16 R19: library part CMP-03211-000130-1, "SMD Chip Resistor, Thin Film, 10KΩ, 100 V, 0805 [2012 Metric], 100 mW, 0.1%, RN73 Series", Manufacturer="TE Connectivity", Package=RN732A, Power Rating=0.1W, Resistance=10KΩ, Temperature="-55°C to 155°C", Temperature Coefficient=10ppm/°C, Temperature Range High=155°C, Temperature Range Low=-55°C, Tolerance=0.1%, Voltage Rating=100V, Automotive=No, Category=Res, ComponentLink2Description=Datasheet, ComponentLink2URL=https://www.te.com/commerce/DocumentDelivery/DDEController?Action=showdoc&DocId=Data+Sheet%7F1773270%7FP%7Fpdf%7FEnglish%7FENG_DS_1773270_P.pdf%7F1676162-2, Composition="Thin Film", Device Class L1="Passive Components", Device Class L2=Resistors, Device Class L3="Chip SMD Resistors", Height=0.65mm, Ipc Land Pattern Name=RESC200125X55, Lead Free=Yes, Manufacturer Part Number=RN73C2A10KBTDF, Octopart=https://octopart.com/rn73c2a10kbtdf-te+connectivity-21400356, octopart_url=https://octopart.com/rn73c2a10kbtdf-te+connectivity-21400356, Packaging="1000 Reel", RoHS=TRUE, Series=RN73
R2 R3: library part CMP-0584-00001-2, "ESD Protector, 5 V Supply, -40 to 85 degC, 1.6 x 0.8 x 0.55 mm SMD, RoHS, Tape and Reel", Manufacturer=Bourns, Operating Temperature="-40 to 85 degC", CO="0.5 pF", ComponentLink1Description="Manufacturer URL", ComponentLink1URL=http://www.bourns.com/, ComponentLink2Description=Datasheet, ComponentLink2URL=http://www.bourns.com/data/global/pdfs/MLC.pdf, DatasheetVersion="Rev. S", Mounting Technology="Surface Mount", PackageDescription="2-Pin SMD, Body 1.6 x 0.8 mm, Pitch 1.52 mm", PackageReference=CG0603-2, Packing="Tape and Reel", PartNumber=CG0603MLC-05E, RoHS=TRUE, RT="1 ns", VC="20 V", VDC="5 V", VT="150 V"
R4 R6: library part CMP-2001-00523-1, Manufacturer=Panasonic, Part Number=ERJ6ENF22R0V
R7: library part CMP-1659-00013-4, "Chip Resistor, 10 KOhm, +/- 1%, 0.125 W, -55 to 155 degC, 0805 (2012 Metric), RoHS, Tape and Reel", Manufacturer=Yageo, Max Operating Temperature="155 degC", Min Operating Temperature="-55 degC", Package Quantity=5000, Voltage Rating="150 V", ComponentLink1Description="Manufacturer URL", ComponentLink1URL=http://www.yageo.com/, ComponentLink2Description=Datasheet, ComponentLink2URL=http://www.yageo.com/documents/recent/PYu-RC_Group_51_RoHS_L_04.pdf, DatasheetVersion="Rev. 4, 02/2016", Height="0.5 mm", Length="2 mm", Mount="Surface Mount", Mounting Technology="Surface Mount", PackageDescription="2-Pin Surface Mounted Device, Body 2 x 1.25 mm", PackageReference=0805, Packaging="Tape and Reel", Pins=2, REACH SVHC="No SVHC", RoHSCompliant=true
R9: library part CMP-1013-00557-4, "RES Thick Film, 2.7kΩ, 1%, 0.125W, 100ppm/°C, 0805", Case Code (Imperial)=0805, Case Code (Metric)=2012, Max Operating Temperature=155°C, Max Power Dissipation=125mW, Min Operating Temperature=-55°C, Package Quantity=10, Resistance=2.7kR, Temperature Coefficient=100ppm/°C, Tolerance=1%, Voltage Rating=150V, Case/Package=0805, Composition="Thick Film", Contact Plating=Tin, Depth=1.25mm, Features="Automotive AEC-Q200", Height=0.45mm, Lead Free="Lead Free", Length=2mm, Military Standard=Not, Mount="Surface Mount", Number of Pins=2, Number of Terminations=2, Packaging="Tape and Reel", Power Rating=125mW, Radiation Hardening=No, Termination=SMD/SMT, Voltage Rating (DC)=150V, Weight=0.000194oz, Width=1.25mm
R10: library part CMP-2001-02814-1, Manufacturer=Susumu, Part Number=RG2012P-183-D-T5
R11 R14: library part CMP-2001-03219-1, Manufacturer=Susumu, Part Number=RR1220P-105-D
R12 R13: library part CMP-2001-00653-1, Manufacturer=Panasonic, Part Number=ERA6AEB562V
R15 R20: library part CMP-03211-000756-1, "SMD Chip Resistor, Thin Film, 100Ω, 100 V, 0805 [2012 Metric], 100 mW, 0.1%, RN73 Series", Manufacturer="TE Connectivity", Package=RN732A, Power Rating=0.1W, Resistance=100Ω, Temperature="-55°C to 155°C", Temperature Coefficient=10ppm/°C, Temperature Range High=155°C, Temperature Range Low=-55°C, Tolerance=0.1%, Voltage Rating=100V, Automotive=No, Category=Res, ComponentLink2Description=Datasheet, ComponentLink2URL=https://www.te.com/commerce/DocumentDelivery/DDEController?Action=showdoc&DocId=Data+Sheet%7F1773270%7FP%7Fpdf%7FEnglish%7FENG_DS_1773270_P.pdf%7F1676162-2, Composition="Thin Film", Device Class L1="Passive Components", Device Class L2=Resistors, Device Class L3="Chip SMD Resistors", Height=0.65mm, Ipc Land Pattern Name=RESC200125X55, Lead Free=Yes, Manufacturer Part Number=RN73C2A100RBTDF, Octopart=https://octopart.com/rn73c2a100rbtdf-te+connectivity-41188433, octopart_url=https://octopart.com/rn73c2a100rbtdf-te+connectivity-41188433, Packaging="1000 Reel", RoHS=TRUE, Series=RN73
R17: library part CMP-03211-008984-1, "SMD Chip Resistor, Thin Film, 4.75KΩ, 100 V, 0805 [2012 Metric], 100 mW, 0.1%, RN73 Series", Manufacturer="TE Connectivity", Package=RN732A, Power Rating=0.1W, Resistance=4.75KΩ, Temperature="-55°C to 155°C", Temperature Coefficient=10ppm/°C, Temperature Range High=155°C, Temperature Range Low=-55°C, Tolerance=0.1%, Voltage Rating=100V, Automotive=No, Category=Res, ComponentLink2Description=Datasheet, ComponentLink2URL=https://www.te.com/commerce/DocumentDelivery/DDEController?Action=showdoc&DocId=Data+Sheet%7F1773270%7FP%7Fpdf%7FEnglish%7FENG_DS_1773270_P.pdf%7F1676162-2, Composition="Thin Film", Device Class L1="Passive Components", Device Class L2=Resistors, Device Class L3="Chip SMD Resistors", Height=0.65mm, Ipc Land Pattern Name=RESC200125X55, Lead Free=Yes, Manufacturer Part Number=RN73C2A4K75BTDF, Octopart=https://octopart.com/rn73c2a4k75btdf-te+connectivity-21411993, octopart_url=https://octopart.com/rn73c2a4k75btdf-te+connectivity-21411993, Packaging="1000 Reel", RoHS=TRUE, Series=RN73
R18: library part CMP-26527-002510-1, "Res Thick Film 2512 20mΩ 1% 2W ±200ppm/°C Molded SMD Plastic T/R", Case Code (Imperial)=2512, Case Code (Metric)=6432, Max Operating Temperature=155°C, Max Power Dissipation=2W, Min Operating Temperature=-55°C, Resistance=20mR, Resistor Type="Thick Film", Temperature Coefficient=200ppm/°C, Tolerance=1%, Case/Package=2512, Construction=Rectangular, Contact Plating=Tin, Depth=3.15mm, Height=0.028inch, Lead Free="Lead Free", Length=0.25inch, Military Standard=Not, Mount="Surface Mount", Number of Terminations=2, Packaging="Tape and Reel", Power Rating=2W, Radiation Hardening=No, RoHS Compliant=Yes, Series=CSRN, Size Code=2512, Width=0.124inch
R21: library part CMP-2001-03217-1, Manufacturer=Susumu, Part Number=RR1220P-104-D
R22: library part CMP-2001-04009-2, "RES Thick Film, 560kΩ, 1%, 0.125W, 100ppm/°C, 0805", Case Code (Imperial)=0805, Case Code (Metric)=2012, Max Operating Temperature=155°C, Max Power Dissipation=125mW, Min Operating Temperature=-55°C, Package Quantity=10, Resistance=560kR, Temperature Coefficient=100ppm/°C, Tolerance=1%, Voltage Rating=150V, Case/Package=0805, Composition="Thick Film", Contact Plating=Tin, Depth=1.25mm, Features="Automotive AEC-Q200", Height=0.45mm, Lead Free="Lead Free", Length=2mm, Military Standard=Not, Number of Terminations=2, Packaging="Tape and Reel", Power Rating=125mW, Radiation Hardening=No, Termination=SMD/SMT, Voltage Rating (DC)=150V, Weight=0.000194oz, Width=0.049inch
T1: "RoHS Compliant", Package="D2PAK Infineon", Availability=Unavailable, Check_prices=https://www.snapeda.com/parts/IRF9540NSPBF/Infineon%20Technologies/view-part/572451/?ref=eda, MF=Infineon, MP=IRF9540NSPBF, Price=None, SnapEDA_Link=https://www.snapeda.com/parts/IRF9540NSPBF/Infineon%20Technologies/view-part/572451/?ref=snap
T2 T3: library part CMP-1177-00037-1, "NPN Silicon AF Transistor, 45 V VCEO, 100 mA IC, SOT23, Reel, Green", Manufacturer=Infineon, ComponentLink1Description="Manufacturer URL", ComponentLink1URL=http://www.infineon.com/, ComponentLink2Description=Datasheet, ComponentLink2URL=http://www.infineon.com/dgdl/bc847series_bc848series_bc849series_bc850series.pdf?folderId=db3a304314dca389011541d30fa21656&fileId=db3a304314dca389011541d4630a1657, ComponentLink3Description="Package Specification", ComponentLink3URL=http://www.infineon.com/dgdl/SOT23-Package_Overview.pdf?folderId=db3a30431936bc4b0119532290053c66&fileId=db3a30431936bc4b0119533468123c85, fT (typ)="250Â MHz", Green=TRUE, IBM (max)="200Â mA", IC (max)="100Â mA", ICBO (max)="15Â nA", ICM (max)="200Â mA", Mounting Technology="Surface Mount", PackageDescription="3-Pin Small Outline Transistor Package, 1.3 x 2.9 mm Body, 0.95 mm Pitch", PackageReference=SOT23, PackageVersion=Apr-08, Packing=Reel, PartNumber=BC847C, Polarity=NPN, Ptot (max)="330Â mW", VCBO (max)="50Â V", VCEO (max)="45Â V", VEBO (max)="6Â V"
T4: library part CMP-1177-00039-1, "PNP Silicon AF Transistor, 45 V VCEO, 100 mA IC, SOT23, Reel, Green", Manufacturer=Infineon, ComponentLink1Description="Manufacturer URL", ComponentLink1URL=http://www.infineon.com/, ComponentLink2Description=Datasheet, ComponentLink2URL=http://www.infineon.com/dgdl/bc857series_bc858series_bc859series_bc860series.pdf?folderId=db3a304314dca389011541d30fa21656&fileId=db3a304314dca389011541da0e3a1661, ComponentLink3Description="Package Specification", ComponentLink3URL=http://www.infineon.com/dgdl/SOT23-Package_Overview.pdf?folderId=db3a30431936bc4b0119532290053c66&fileId=db3a30431936bc4b0119533468123c85, fT (typ)="250Â MHz", Green=TRUE, IBM (max)="200Â mA", IC (max)="100Â mA", ICBO (max)="15Â nA", ICM (max)="200Â mA", Mounting Technology="Surface Mount", PackageDescription="3-Pin Small Outline Transistor Package, 1.3 x 2.9 mm Body, 0.95 mm Pitch", PackageReference=SOT23, PackageVersion=Apr-08, Packing=Reel, PartNumber=BC857C, Polarity=PNP, Ptot (max)="330Â mW", VCBO (max)="50Â V", VCEO (max)="45Â V", VEBO (max)="5Â V"
X1: library part CMP-27762-000014-1, "CRYSTAL 16MHZ 12PF SMD", Frequency=16MHz, Load Capacitance=12pF, Manufacturer="Abracon LLC", Package=ABM8AIG, Temperature="-40°C to +125°C", Temperature Range High=+125°C, Temperature Range Low=-40°C, Tolerance=20ppm, Automotive=Yes, Automotive Grade="Grade 1", Category=Crys, ComponentLink2Description=Datasheet, ComponentLink2URL=https://abracon.com/AIGcrystals/ABM8AIG.pdf, Device Class L1="Passive Components", Device Class L2="Crystals / Oscillators", Device Class L3=Crystals, Digikey Description="CRYSTAL 16MHZ 12PF SMD", Esr=70Ω, Height=0.8mm, Lead Free=Yes, Manufacturer Part Number=ABM8AIG-16.000MHZ-12-2Z-T3, Mouser Description="Crystals 16MHz AECQ200 12pF 20ppm -40C +125C", Octopart=https://octopart.com/abm8aig-16.000mhz-12-2z-t3-abracon-70466545, RoHS=TRUE, Series=ABM8AIG, Stability=50ppm

## Free pads (board coordinates)
  round 60 hole 137.8 unplated: q(2350,5160) q(2355,3185) q(2365,1195) q(5370,1195) q(5380,3195) q(5400,5180)

## Via types
v1: diameter 30, hole 13, Top Layer to Bottom Layer, 115 vias

## Nets (pads, with @x,y where several pads share a name; then routed paths per layer and width w, separated by ;. In a path a pad name is that pad's centre, name@x,y a point inside that pad or via, vN(x,y) a via of type N, cw(c..) or ccw(c..) an arc to the next point about the centre after c; other vN are vias at no path point)
+5: C1.1 C2.1 C5.1 C6.1 C7.1 C9.1 C10.1 C14.1 C16.1 C18.1 C20.1 C21.1 D1.2 D3.1 D4.2 IC1.2 IC2.8 IC3.5 IC4.2 IC4.14 IC4.24 IC4.34 K4.2 L1.1 LCD1.5 R1.2 R5.2 R11.2 R16.2 | length 20548.9
  Top Layer w20: C10.1 2802.63,2705.63 v1(2824,2727) ; D3.1 2753.43,1799.99 2777,1776.42 v1(2777,1720) ; C16.1 2959,1120 2964,1115 2985,1115 ; v1(2930,2709) 2930,2711.71 2946.06,2727.76 2946.06,2747.06 2959.47,2760.47 3021.47,2760.47 3051,2790 3270,2790 3365.5,2885.5 ; IC2.8 2995,3828 v1(3027,3828) ; v1(3088,4224) 3089.91,4222.09 3089.91,4191.26 3106.09,4175.09 3106.09,4155.09 3058,4107 3058,3992.21 3086.9,3963.32 3089.28,3963.32 3112.13,3940.47 C9.1 3198,3940.47 3245.06,3917.83 ; K4.2 3095,1484 2985,1374 2985,1115 ; R11.2 3226,4640 ; v1(3216.11,3888.89) 3245.06,3917.83 ; v1(3225,4562) 3225,4639 3226,4640 ; LCD1.5 3365.5,2894.34 3365.5,2885.5 ; v1(3295,2371) 3296.91,2369.09 3296.91,2349.47 3342.69,2303.68 3380.49,2303.68 IC4.2 ; C7.1 3245.06,3917.83 ; L1.1 3421.37,2687 ; v1(3450,2650) 3451.91,2651.91 3451.91,2684.91 3454,2687 ; v1(3508,1858) 3508,1860.71 3511.1,1863.81 IC4.14 ; v1(3637,3722) 3665,3722 IC3.5 ; IC4.34 3838.58,2401.42 v1(3840,2400) ; IC4.24 3888.98,2051.02 v1(3890,2050) ; v1(4052,2303) 4052,2305.71 4063.11,2316.82 4063.11,2351.93 4071.81,2360.63 C2.1 ; C1.1 4272.79,1395.16 4282.79,1385.16 R1.2 4291.26,1383.58 4416.42,1383.58 v1(4418,1382) ; v1(4171,2270) 4214.68,2313.68 R5.2 ; v1(4330,1710.69) 4268,1648.69 ; v1(4357,2041) 4357,2253 4268,2342 4268,2385.5 4256.28,2397.21 4181.07,2397.21 4171.11,2407.17 4171.11,2460.62 4181.07,2470.58 4202.28,2470.58 4214,2482.3 4214,2607 4028,2793 C20.1@3950,2793 ; IC1.2 4840,3487 4876.53,3450.47 C5.1 ; C6.1 5302.47,3425 5277,3450.47 C5.1 ; 2985,1115 D1.2 3113,1115 3128,1130 R16.2 3686,1130 4045.91,1489.91 4109.22,1489.91 4268,1648.69 ; 3226,4640 3316,4640 3644,4312 3800,4312 3860,4252 3860,3874.53 4000,3734.53 C21.1 4203,3734.53 4240.64,3772.17 4337.83,3772.17 C18.1 4350,3764.65 4366.57,3748.07 4386.26,3748.07 4399.33,3735 4400,3735 4500,3635 D4.2 4500,3483 3950,2933 C20.1@3950,2793 ; 3365.5,2885.5 3396.66,2916.66 3414.77,2916.66 3443.18,2945.07 3443.18,2963.18 3456.72,2976.72 3473.28,2976.72 3485,2965 3485,2750.63 3421.37,2687 ; 3421.37,2687 3454,2687 ; 3454,2687 3512,2745 3512,3049 3535,3072 3706,3072 3750,3028 C14.1 3843,2779.53 3855.64,2792.16 C20.1 C20.1@3950,2793 ; 4268,1648.69 4268,1512.3 4256.28,1500.58 4256.07,1500.58 4246.11,1490.62 4246.11,1437.17 4256.07,1427.21 4323.3,1427.21 4336.09,1440 5010,1440 5170,1600 C5.1
  Bottom Layer w20: v1(2777,1720) 2871.46,1625.54 2871.46,1597.54 2964,1505 K4.2 ; v1(2824,2727) 2909.29,2727 2927.29,2709 v1(2930,2709) ; v1(3027,3828) 3027,3478 3485,3020 3485.66,3020.66 3485.66,3240.47 3637,3391.82 3637,3600 ; v1(3088,4224) 3089.91,4222.09 3132.62,4222.09 3141.25,4213.46 3174.46,4213.46 3225,4264 v1(3225,4562) ; v1(3216.11,3888.89) 3580,3543 3637,3600 ; v1(3295,2371) 3326.89,2402.89 3326.89,2416.89 3370,2460 3420,2460 ; v1(3450,2650) 3470,2630 3470,2610 3420,2560 3420,2460 ; v1(3508,1858) 3508,1804.82 3543.48,1769.34 3879.16,1769.34 3910,1800.18 3910,1890.15 3890,1910.15 v1(3890,2050) 3890,2303 3890,2313 ; v1(3637,3722) 3637,3600 ; v1(4171,2270) 4138,2303 3974.65,2303 3964.65,2313 3890,2313 ; v1(4357,2041) 4357,1882.13 4330,1855.13 v1(4330,1710.69) 4418,1622.69 v1(4418,1382) ; 3420,2460 3800,2460 3840,2420 v1(3840,2400) 3878.28,2400 3890,2388.28 3890,2313
GND: C3.2 C4.2 C5.2 C6.2 C7.2 C8.2 C9.2 C10.2 C11.2 C12.2 C13.2 C14.2 C15.1 C16.2 C17.1 C18.2 C19.1 C20.2 C21.2 C22.1 C23.2 C24.1 ENC1.2 ENC1.C IC1.1 IC2.4 IC3.2 IC4.5 IC4.15 IC4.23 IC4.35 IC4.43 K1.2 K2.5 K3.3 K4.6 LCD1.6 R2.1 R3.1 R8.1 R9.2 R14.1 R15.1 R22.2 T3.2 T4.3 X1.2 X1.4 | length 26282.4
  Top Layer w20: K2.5 2360,2400 R3.1 2794,2381 2794,2365 2810,2365 ; C11.2 2570,2718 2630.47,2718 2681.24,2768.76 ; C10.2 2685.31,2764.69 2681.24,2768.76 ; R14.1 2732,4624 2732,4124.46 2780,4076.46 ; T3.2 2817.6,3431 2850,3463.4 T4.3 2799.28,3529.72 2780,3549 2780,4076.46 ; C16.2 2800,1120 2740,1180 2740,1448 ; IC2.4 2800,4056.46 2780,4076.46 ; 2880,2381.83 2863.17,2365 2810,2365 ; 2880,2382.07 2894,2396.07 2894,2499.25 2880,2513.25 2880,2565.45 ; v1(2960,4520) 2961.91,4518.09 2989.43,4518.09 R15.1@3020.63,4486.89 ; v1(3145,2270) 3143.09,2268.09 3143.09,2255.73 3114.92,2227.56 C24.1 ; v1(3150,4790) 3151.84,4791.84 K3.3 ; C22.1 3135,2627.44 3135,2598 3155,2598 ; 3173.86,3186.14 3265,3095 3367,3095 ; v1(3210.57,2260.81) 3212.49,2258.9 3212.49,2248.61 3274.07,2187.03 3290.64,2187.03 3311.42,2207.81 3380.49,2207.81 IC4.5 ; C15.1 3240,3250 3176.14,3186.14 3138.69,3186.14 2943.18,2990.63 2943.18,2839.42 2923.28,2819.53 2880,2819.53 ; LCD1.6 3394.68,3067.32 3367,3095 ; IC4.43 3479.61,2471.77 3475,2476.38 3475,2515 v1(3485,2525) ; v1(3520,2600) 3518.09,2601.91 3518.09,2636.91 3507,2648 ; X1.4 3536.69,1564.93 3549.96,1578.19 3600,1578.19 3707.99,1686.18 ; IC4.15@3542.91,1915 3542.91,1908.19 3544.09,1907.01 3544.09,1841.72 3575.81,1810 3669.5,1810 3682.84,1823.34 3699.41,1823.34 3700.75,1822 3754,1822 3830,1898 IC4.23 3859.52,2019.53 3887.35,1991.69 v1(3985.64,1991.69) ; v1(3585,3020) 3552,2987 3552,2693 ; X1.2 3689.81,1468.5 3707.99,1486.68 3707.99,1686.18 ; IC3.2 3702.4,3660.61 3701,3660.61 3701,3601.4 ; 3707.99,1822 3707.99,1764 ; IC4.35 3731.57,2468.28 3743.29,2480 3999.5,2480 4043.58,2524.08 4043.58,2553.58 v1(4070,2580) ; v1(4010,2690) 3952.17,2690 C20.2 3865.64,2687.83 3833,2720.47 C14.2 3682.47,2720.47 3682,2720 3666.57,2735.43 3666.57,2737.46 3654.86,2749.17 3648.23,2749.17 3627.87,2769.53 C23.2 3619.53,2770 3568,2770 3568,2709 3552,2693 ; v1(4151,1964) 4162.16,1975.16 ENC1.C ; C18.2 4345.47,3675.47 C21.2 4057.47,3675.47 3879,3497 3805.4,3497 3718.4,3584 ; ENC1.2 4634.25,1750.75 4689.09,1805.59 v1(4758,1805.59) 4823,1805.59 5011,1993.59 5011,3050 4851,3050 4801,3000 R9.2 ; K1.2 4993.43,4556.43 4907.17,4470.17 C3.2 4907.17,3913.64 4869.53,3876 C4.2 4869.53,3721.02 4930.55,3660 IC1.1 4970.04,3509.53 C5.2 5260,3509.53 5293.58,3543.11 C6.2 ; 2681.24,2768.76 2732,2819.53 2880,2819.53 ; 2740,1448 C8.2 2740,1565 2736.26,1568.74 R8.1 2736.26,1739 2720,1755.26 2720,1919 2755.16,1954.16 R2.1 2760.27,2020 2765.23,2024.96 2765.23,2046.28 2776.95,2058 2893.28,2058 2910,2074.72 2910,2151.07 2940,2181.07 2940,2263.28 2928.28,2275 2900,2275 2810,2365 ; 2740,1448 2838,1448 K4.6 3149,1759 3297,1759 3346,1710 C17.1 3448.5,1764 3707.99,1764 ; 2780,4076.46 2780,4156.47 2839.53,4216 C12.2 2839.53,4350 2939.53,4450 3020.63,4450 R15.1 R15.1@3020.63,4486.89 ; 2880,2565.45 2880,2819.53 ; 2880,2565.45 2912.54,2597.99 2988.17,2597.99 3040,2546.16 3040,2292.64 3105.08,2227.56 C24.1 ; R15.1@3020.63,4486.89 3020.63,4509.63 3050,4539 3140,4539 3140,4019.53 C9.2 3198,3999.53 3220.64,4022.17 C7.2 3300,4002 3337,4002 3395.98,3943.02 3395.98,3741.37 R22.2 3400,3943.02 3400,4077 3600,4277 3744,4277 3771,4250 3771,3584 3718.4,3584 ; C24.1 3110,2280 3070,2320 3070,2522.43 3093.64,2546.07 3131.36,2546.07 3155,2569.72 3155,2598 ; 3155,2598 3265.57,2598 3280.57,2613 3472,2613 3507,2648 ; 3367,3095 3515.57,3095 3522.57,3102 3718.43,3102 3725.43,3095 3883.28,3095 3895,3106.72 3895,3244 3925,3274 3925,3326 3911.94,3339.06 C13.2 3826,3339.06 3701,3464.06 3701,3601.4 ; 3507,2648 3552,2693 ; 3701,3601.4 3718.4,3584 ; 3707.99,1686.18 C19.1 3707.99,1764
  Bottom Layer w20: v1(2960,4520) 2960,4558.28 2971.72,4570 3138.28,4570 3150,4581.72 v1(3150,4790) ; v1(3145,2270) 3198.68,2270 3207.87,2260.81 v1(3210.57,2260.81) ; v1(3485,2525) 3520,2560 v1(3520,2600) ; v1(3585,3020) 3585,3017.29 3610,2992.29 3610,2690 3706.72,2593.28 3723.28,2593.28 3760,2630 3760,2730 ; v1@3987,1989 4012,1964 v1(4151,1964) ; v1(4010,2690) 4010,2640 v1(4070,2580) ; v1(4758,1805.59) 4578.59,1985 4508.25,1985 3866.33,2626.91 3866.33,2653.92 3790.25,2730 3760,2730 ; K1.2 4993.43,4428.43 3720,3155 3720,2770 3760,2730
NetC1_2: C1.2 ENC1.A IC4.27 R1.1 | length 1622.5
  Top Layer w20: IC4.27 4205.51,2145.51 ENC1.A@4280,2071.02 ; C1.2 4132.56,1454.21 4231.34,1553 v1(4232,1553) ; ENC1.A 4304.92,2053.07 4304.92,2029.83 4328.75,2006 4412.28,2006 4424,1994.28 4424,1512 4393.71,1481.71 4393.71,1481 4388.71,1476 v1(4386,1476) ; R1.1 4292.79,1467 v1@4374.29,1467
  Bottom Layer w20: v1(4232,1553) 4309,1553 v1(4386,1476)
NetC2_2: C2.2 ENC1.B IC4.29 R5.1 | length 2548.1
  Top Layer w20: IC4.29 3830.32,2208.82 4008.28,2208.82 4020,2220.53 4020,2370.26 4036.11,2386.37 4046.07,2396.33 4051.39,2396.33 4063.11,2408.05 4063.11,2410.98 4071.81,2419.69 C2.2 ; C2.2@4080,2419.69 4080,2469.84 4094.14,2483.99 4094.72,2483.99 4125,2514.27 v1(4125,2515) ; 4083.54,2473.38 4083.54,2537.54 4122.18,2576.18 4142.18,2576.18 v1(4144,2578) ; R5.1 4223.26,2442.47 4274.77,2442.47 4278.29,2446 v1(4281,2446) ; v1(4270,2710) 4270,2474.53 4330,2474.53 4344.21,2488.74 4466,2488.74 4718,2236.74 4718,2174.85 v1(4474.72,1931.57) ; ENC1.B 4284.54,1876.87 4388.87,1876.87 v1(4389,1877)
  Bottom Layer w20: v1(4125,2515) 4157.2,2482.8 4157.2,2460.6 4171.8,2446 v1(4281,2446) ; v1(4144,2578) 4206.32,2640.32 4206.32,2646.32 v1(4270,2710) ; v1(4389,1877) 4441.66,1929.66 4472.81,1929.66 v1(4474.72,1931.57)
NetC8_1: C8.1 D3.2 F1.2 IC4.7 R8.2 | length 2027.4